# EAGLE board CT_schematic (EAGLE 7.6.0)

Size 100 x 80 mm. Coordinates in mm from the lower left corner, seen from the top.
Outline: 0,0 100,0 100,80 0,80 0,0
Copper layers (1*16): Top 0.035mm / dielectric 1.5mm / Bottom 0.035mm
Design rules "default": minimum track width 10mil, minimum drill 24mil, track to track 8mil, track to pad 8mil, pad to pad 8mil, via to via 8mil, smd to smd 8mil, copper to edge 40mil, drill to drill 8mil, minimum pad ring 10mil, minimum via ring 8mil, stop-mask expansion 4mil, vias tented up to drill 0mil, thermal gap 10mil

## Footprints (pad centres in the part's own frame; a part is rotated, then mirrored left to right if it is on the bottom)
C0603 = smd 0.8 x 0.8: 1 -0.762,0; 2 0.762,0
C0402 = smd 0.5 x 0.5: 1 -0.508,0; 2 0.508,0
C0805 = smd 1.2 x 1.3: 1 -1.016,0; 2 1.016,0
C1206 = smd 1.3 x 1.6: 1 -1.524,0; 2 1.524,0
L0603 = smd 0.8 x 0.8: 1 -0.762,0; 2 0.762,0
DR1040 = smd 1.6 x 3.2: 1 -4.458,0; 2 4.458,0
R0603 = smd 0.8 x 0.8: 1 -0.762,0; 2 0.762,0
UFBGA100 = smd 0.28 x 0.28: A1 -2.75,2.75; A2 -2.25,2.75; A3 -1.75,2.75; A4 -1.25,2.75; A5 -0.75,2.75; A6 -0.25,2.75; A7 0.25,2.75; A8 0.75,2.75; A9 1.25,2.75; A10 1.75,2.75; A11 2.25,2.75; A12 2.75,2.75; B1 -2.75,2.25; B2 -2.25,2.25; B3 -1.75,2.25; B4 -1.25,2.25; B5 -0.75,2.25; B6 -0.25,2.25; B7 0.25,2.25; B8 0.75,2.25; B9 1.25,2.25; B10 1.75,2.25; B11 2.25,2.25; B12 2.75,2.25; C1 -2.75,1.75; C2 -2.25,1.75; C3 -1.75,1.75; C4 -1.25,1.75; C5 -0.75,1.75; C8 0.75,1.75; C9 1.25,1.75; C10 1.75,1.75; C11 2.25,1.75; C12 2.75,1.75; D1 -2.75,1.25; D2 -2.25,1.25; D3 -1.75,1.25; D10 1.75,1.25; D11 2.25,1.25; D12 2.75,1.25; E1 -2.75,0.75; E2 -2.25,0.75; E3 -1.75,0.75; E10 1.75,0.75; E11 2.25,0.75; E12 2.75,0.75; F1 -2.75,0.25; F2 -2.25,0.25; F11 2.25,0.25; F12 2.75,0.25; G1 -2.75,-0.25; G2 -2.25,-0.25; G11 2.25,-0.25; G12 2.75,-0.25; H1 -2.75,-0.75; H2 -2.25,-0.75; H3 -1.75,-0.75; H10 1.75,-0.75; H11 2.25,-0.75; H12 2.75,-0.75; J1 -2.75,-1.25; J2 -2.25,-1.25; J3 -1.75,-1.25; J10 1.75,-1.25; J11 2.25,-1.25; J12 2.75,-1.25; K1 -2.75,-1.75; K2 -2.25,-1.75; K3 -1.75,-1.75; K4 -1.25,-1.75; K5 -0.75,-1.75; K8 0.75,-1.75; K9 1.25,-1.75; K10 1.75,-1.75; K11 2.25,-1.75; K12 2.75,-1.75; L1 -2.75,-2.25; L2 -2.25,-2.25; L3 -1.75,-2.25; L4 -1.25,-2.25; L5 -0.75,-2.25; L6 -0.25,-2.25; L7 0.25,-2.25; L8 0.75,-2.25; L9 1.25,-2.25; L10 1.75,-2.25; L11 2.25,-2.25; L12 2.75,-2.25; M1 -2.75,-2.75; M2 -2.25,-2.75; M3 -1.75,-2.75; M4 -1.25,-2.75; M5 -0.75,-2.75; M6 -0.25,-2.75; M7 0.25,-2.75; M8 0.75,-2.75; M9 1.25,-2.75; M10 1.75,-2.75; M11 2.25,-2.75; M12 2.75,-2.75
SAMTEC_FTSH-105-01-L-DV-K = smd 0.762 x 2.794: 1 -2.54,-2.032; 2 -2.54,2.032; 3 -1.27,-2.032; 4 -1.27,2.032; 5 0,-2.032; 6 0,2.032; 7 1.27,-2.032; 8 1.27,2.032; 9 2.54,-2.032; 10 2.54,2.032
QFN65P400X400X100-17N = smd 1.016 x 0.356: 1 -1.803,0.965; 2 -1.803,0.33; 3 -1.803,-0.33; 4 -1.803,-0.965; 9 1.803,-0.965; 10 1.803,-0.33; 11 1.803,0.33; 12 1.803,0.965 | smd 0.356 x 1.016: 5 -0.965,-1.803; 6 -0.33,-1.803; 7 0.33,-1.803; 8 0.965,-1.803; 13 0.965,1.803; 14 0.33,1.803; 15 -0.33,1.803; 16 -0.965,1.803 | smd 2.108 x 2.108: 17 0,0
HTSS-105-01-G-D = drill 1 pad 1.8 square: 1 0,0 | drill 1 pad 1.8: 2 0,2.54; 3 2.54,0; 4 2.54,2.54; 5 5.08,0; 6 5.08,2.54; 7 7.62,0; 8 7.62,2.54; 9 10.16,0; 10 10.16,2.54
FCI_10118193-0001LF = smd 0.4 x 1.35: 1 -1.3,2.675; 2 -0.65,2.675; 3 0,2.675; 4 0.65,2.675; 5 1.3,2.675 | smd 1.6 x 1.4: 6 -3.2,2.45; 7 3.2,2.45 | smd 1.9 x 1.9: 8 -1.2,0; 9 1.2,0 | hole 0.5: -3.3,0; 3.3,0
SOT143B = smd 1 x 0.7: 1 -0.75,-1 | smd 0.6 x 0.7: 2 0.95,-1; 3 0.95,1; 4 -0.95,1
ABS07-32.768KHZ-7-T = smd 1.1 x 2.4: 1 -2.5,0; 2 0,0
ABLS-25.000MHZ-B2F-T = smd 5.6 x 2.8: 1 -3.81,0; 2 5.69,0
TSOT-23-5 = smd 1.3 x 0.62: 1 -1.31,0.95; 2 -1.31,0; 3 -1.31,-0.95; 4 1.31,-0.95; 5 1.31,0.95
DFN8_2X3MC = smd 0.813 x 0.305: 1 -1.398,0.75; 2 -1.398,0.25; 3 -1.398,-0.25; 4 -1.398,-0.75; 5 1.398,-0.75; 6 1.398,-0.25; 7 1.398,0.25; 8 1.398,0.75 | smd 1.753 x 1.549: 9 0,0
JST-2-SMD = smd 1 x 4.6: 1 -1,-3.7; 2 1,-3.7 | smd 1.6 x 3.4: NC1 -3.4,1.5; NC2 3.4,1.5
SON-6 = smd 0.55 x 0.3: 1 -0.355,0.5 | smd 0.52 x 0.3: 2 -0.37,0; 3 -0.37,-0.5; 4 0.37,-0.5; 5 0.37,0; 6 0.37,0.5
SW_4-1437565-2 = smd 1.4 x 2.1: 1 -2.23,4.55; 2 -2.23,-4.55; 3 2.23,4.55; 4 2.23,-4.55
LGM67K-G1J2-24-Z = smd 0.8 x 1.4: A -2,0; C 0,0
NC7SZ125M5X = smd 1.3 x 0.7: 1 -1.3,0.95; 2 -1.3,0; 3 -1.3,-0.95; 4 1.3,-0.95; 5 1.3,0.95
DUMMY_PACKAGE_135 = drill 0.3: 1 0,-1; 2 1.5,-1

## Placement (x,y rotation side)
C1  1e-07  [C0603]  -27.94,60.96 0 top  (outside the outline)
C2  1e-07  [C0603]  -31.75,60.96 0 top  (outside the outline)
C3  1e-07  [C0603]  -35.56,60.96 0 top  (outside the outline)
C4  1e-07  [C0603]  -39.37,60.96 0 top  (outside the outline)
C5  1e-07  [C0603]  -43.18,60.96 0 top  (outside the outline)
C6  4.7e-06  [C0603]  -24.13,60.96 0 top  (outside the outline)
C7  1e-07  [C0603]  -46.99,60.96 0 top  (outside the outline)
C8  1e-08  [C0603]  -50.8,60.96 0 top  (outside the outline)
C9  1e-06  [C0603]  -54.61,60.96 0 top  (outside the outline)
C10  1e-11  [C0402]  -34.29,66.04 0 top  (outside the outline)
C11  1e-11  [C0402]  -38.1,66.04 0 top  (outside the outline)
C12  1e-11  [C0402]  -41.91,66.04 0 top  (outside the outline)
C13  1e-11  [C0402]  -45.72,66.04 0 top  (outside the outline)
C14  1e-07  [C0402]  -49.53,66.04 0 top  (outside the outline)
C15  1e-07  [C0402]  -53.34,66.04 0 top  (outside the outline)
C16  1e-07  [C0402]  -57.15,66.04 0 top  (outside the outline)
C17  1e-06  [C0603]  -58.42,60.96 0 top  (outside the outline)
C18  1e-05  [C0805]  -40.64,49.53 0 top  (outside the outline)
C19  1e-05  [C0805]  -45.72,49.53 0 top  (outside the outline)
C20  1e-07  [C0402]  -60.96,66.04 0 top  (outside the outline)
C21  1e-05  [C1206]  -16.51,49.53 0 top  (outside the outline)
C22  1e-05  [C1206]  -22.86,49.53 0 top  (outside the outline)
C23  1e-08  [C0402]  -64.77,66.04 0 top  (outside the outline)
C24  1e-08  [C0402]  -68.58,66.04 0 top  (outside the outline)
F1  240.0  [L0603]  -62.23,60.96 0 top  (outside the outline)
I1  5.2e-06  [DR1040]  -54.61,21.59 0 top  (outside the outline)
R2  1000.0  [R0603]  -66.04,60.96 0 top  (outside the outline)
R4  4700.0  [R0603]  -15.24,66.04 0 top  (outside the outline)
R6  2200.0  [R0603]  -19.05,66.04 0 top  (outside the outline)
R7  10000.0  [R0603]  -25.4,55.88 0 top  (outside the outline)
R8  10000.0  [R0603]  -30.48,55.88 0 top  (outside the outline)
R9  10000.0  [R0603]  -35.56,55.88 0 top  (outside the outline)
R10  10000.0  [R0603]  -40.64,55.88 0 top  (outside the outline)
R11  10000.0  [R0603]  -45.72,55.88 0 top  (outside the outline)
R12  5.0  [R0603]  -22.86,66.04 0 top  (outside the outline)
R13  10000.0  [R0603]  -50.8,55.88 0 top  (outside the outline)
R14  10000.0  [R0603]  -55.88,55.88 0 top  (outside the outline)
R15  47.0  [R0603]  -26.67,66.04 0 top  (outside the outline)
R16  309473.68421053  [R0603]  -60.96,49.53 0 top  (outside the outline)
R17  1000000.0  [R0603]  -66.04,49.53 0 top  (outside the outline)
R18  10000.0  [R0603]  -60.96,55.88 0 top  (outside the outline)
R19  10000.0  [R0603]  -66.04,55.88 0 top  (outside the outline)
R20  18000.0  [R0603]  -15.24,60.96 0 top  (outside the outline)
R21  470000.0  [R0603]  -15.24,55.88 0 top  (outside the outline)
R22  120000.0  [R0603]  -20.32,55.88 0 top  (outside the outline)
R23  2000.0  [R0603]  -30.48,66.04 0 top  (outside the outline)
R24  10000.0  [R0603]  -20.32,60.96 0 top  (outside the outline)
U1  STM32L152VBH6  [UFBGA100]  -44.45,21.59 0 top  (outside the outline)
U2  FTSH-105-01-L-DV-K  [SAMTEC_FTSH-105-01-L-DV-K]  -63.5,7.62 0 top  (outside the outline)
U3  TSC2013QRSARQ1  [QFN65P400X400X100-17N]  -35.56,7.62 0 top  (outside the outline)
U4  HTSS-105-01-G-D  [HTSS-105-01-G-D]  -43.18,31.75 0 top  (outside the outline)
U5  10118193-0001LF  [FCI_10118193-0001LF]  -52.07,31.75 0 top  (outside the outline)
U6  prtr5v0u2ax  [SOT143B]  -24.13,71.12 0 top  (outside the outline)
U7  ABS07-32.768KHZ-7-T  [ABS07-32.768KHZ-7-T]  -49.53,41.91 0 top  (outside the outline)
U8  ABLS-25.000MHZ-B2F-T  [ABLS-25.000MHZ-B2F-T]  -26.67,43.18 0 top  (outside the outline)
U9  ltc3406es5  [TSOT-23-5]  -50.8,49.53 0 top  (outside the outline)
U10  MCP73831T-2ACI/MC  [DFN8_2X3MC]  -38.1,69.85 0 top  (outside the outline)
U11  S2B-PH-SM4-TB(LF)(SN)  [JST-2-SMD]  -22.86,34.29 0 top  (outside the outline)
U12  TPS3895ADRYR  [SON-6]  -31.75,69.85 0 top  (outside the outline)
U13  4-1437565-2  [SW_4-1437565-2]  -27.94,21.59 0 top  (outside the outline)
U14  Q65110A2395  [LGM67K-G1J2-24-Z]  -58.42,41.91 0 top  (outside the outline)
U15  nc7sz125m5x  [NC7SZ125M5X]  -27.94,49.53 0 top  (outside the outline)
U16  nc7sz125m5x  [NC7SZ125M5X]  -34.29,49.53 0 top  (outside the outline)
U17  Dummy  [DUMMY_PACKAGE_135]  -29.21,71.12 0 top  (outside the outline)

## Library data of the parts
C1-C24 F1 I1 R2 R4 R6-R24 U1-U17 = circuit_tree

## Nets
CLK_CRYSTAL_U1_D1: C10.1 U1.D1 U7.1
CLK_CRYSTAL_U1_E1: C11.1 U1.E1 U7.2
CLK_CRYSTAL_U1_F1: C12.1 U1.F1 U8.1
CLK_CRYSTAL_U1_G1: C13.1 U1.G1 U8.2
GND: C1.2 C2.2 C3.2 C4.2 C5.2 C6.2 C7.2 C8.2 C9.2 C10.2 C11.2 C12.2 C13.2 C14.2 C18.2 C19.1 C19.2 C20.2 C21.2 C22.2 C23.2 C24.2 R2.2 R7.2 R11.2 R12.2 R16.2 R20.2 R22.2 R23.2 U1.D3 U1.E3 U1.F2 U1.F11 U1.F12 U1.J1 U1.K1 U2.3 U2.5 U3.17 U4.9 U5.5 U5.6 U5.7 U5.8 U5.9 U6.1 U9.2 U10.6 U10.9 U11.2 U12.2 U14.C U15.2 U15.3 U16.1 U16.3 U17.1
INPUT_USBPOWER_5V: C21.1 R24.2 U5.1 U6.4 U10.1 U10.2
NET_U1_A4: R7.1 U1.A4
NET_U1_B3: R6.1 U1.B3 U3.1
NET_U1_E2: C7.1 U1.E2
NET_U1_H2: R4.1 U1.H2 U16.4
NET_U1_M1: C8.1 C9.1 F1.1 U1.L1 U1.M1
NET_U1_M11: U14.A
NET_U1_M12: U13.3 U13.4
NET_U2_9: R12.1 U2.9
NET_U3_4: R14.1 U3.4
NET_U3_5: R13.1 U3.5
NET_U3_9: C15.2 C16.2 C17.2 R15.2 U3.9
NET_U3_15: R15.1 U3.8 U3.15
NET_U4_3: U3.12 U4.3
NET_U4_4: U3.14 U4.4
NET_U4_5: U3.11 U4.5
NET_U4_6: U3.13 U4.6
NET_U9_1: U9.1
NET_U9_3: I1.1 U9.3
NET_U9_5: R16.1 R17.1 U9.5
NET_U9_ATNET_3: I1.2 R17.2
NET_U10_5: R24.1 U10.5
NET_U10_8: R23.1 U10.8
NET_U12_1: R19.1 R20.1 U12.1
NET_U12_3: R21.2 R22.1 U12.3
NET_U12_4: R18.1 U12.4 U15.4 U16.2
NET_U13_1: R2.1 U13.1 U13.2
PROC_DAC_OUT2: U1.K4 U17.2
PROC_SYS_JTCK_SWCLK: R11.1 U1.A10 U2.4
PROC_SYS_JTDI: R9.1 U1.A9 U2.8
PROC_SYS_JTDO_TRACESWO: U1.A8 U2.6
PROC_SYS_JTMS_SWDIO: R10.1 U1.A11 U2.2
PROC_USB_DM: U1.B12 U5.2 U6.3
PROC_USB_DP: U1.A12 U5.3 U6.2
RST_OUT_U2_JTAG_RST_B: R8.1 U2.10 U15.1
VCC_S1_3V7: C18.1 C22.1 U9.4 U10.3 U10.4 U11.1
VCC_TIER1_2V5: C1.1 C2.1 C3.1 C4.1 C5.1 C6.1 C14.1 C15.1 C16.1 C17.1 C19.2 C20.1 C23.1 C24.1 F1.2 I1.2 R4.2 R6.2 R8.2 R9.2 R10.2 R13.2 R14.2 R17.2 R18.2 R19.2 R21.1 U1.C4 U1.G2 U1.G11 U1.G12 U1.H3 U2.1 U3.7 U3.10 U12.6 U15.5 U16.5

## Tracks (layer width: path | path; a pad name or v marks a point on that pad's centre or on a via)
CLK_CRYSTAL_U1_D1  (2 unrouted)
CLK_CRYSTAL_U1_E1  (2 unrouted)
CLK_CRYSTAL_U1_F1  (2 unrouted)
CLK_CRYSTAL_U1_G1  (2 unrouted)
GND  (57 unrouted)
INPUT_USBPOWER_5V  (5 unrouted)
NET_U1_A4  (1 unrouted)
NET_U1_B3  (2 unrouted)
NET_U1_E2  (1 unrouted)
NET_U1_H2  (2 unrouted)
NET_U1_M1  (4 unrouted)
NET_U1_M12  (1 unrouted)
NET_U2_9  (1 unrouted)
NET_U3_4  (1 unrouted)
NET_U3_5  (1 unrouted)
NET_U3_9  (4 unrouted)
NET_U3_15  (2 unrouted)
NET_U4_3  (1 unrouted)
NET_U4_4  (1 unrouted)
NET_U4_5  (1 unrouted)
NET_U4_6  (1 unrouted)
NET_U9_3  (1 unrouted)
NET_U9_5  (2 unrouted)
NET_U9_ATNET_3  (1 unrouted)
NET_U10_5  (1 unrouted)
NET_U10_8  (1 unrouted)
NET_U12_1  (2 unrouted)
NET_U12_3  (2 unrouted)
NET_U12_4  (3 unrouted)
NET_U13_1  (2 unrouted)
PROC_DAC_OUT2  (1 unrouted)
PROC_SYS_JTCK_SWCLK  (2 unrouted)
PROC_SYS_JTDI  (2 unrouted)
PROC_SYS_JTDO_TRACESWO  (1 unrouted)
PROC_SYS_JTMS_SWDIO  (2 unrouted)
PROC_USB_DM  (2 unrouted)
PROC_USB_DP  (2 unrouted)
RST_OUT_U2_JTAG_RST_B  (2 unrouted)
VCC_S1_3V7  (5 unrouted)
VCC_TIER1_2V5  (37 unrouted)